# Altium PCB Mixer_module.PcbDoc
Units mil, origin at the board's own origin, x right, y up, seen from the top; angles counter-clockwise.
Board outline 6000 x 4000 mil, 2 copper layers (Top Layer, Bottom Layer); 13 components, 11 nets, 51 pads, 4 vias.
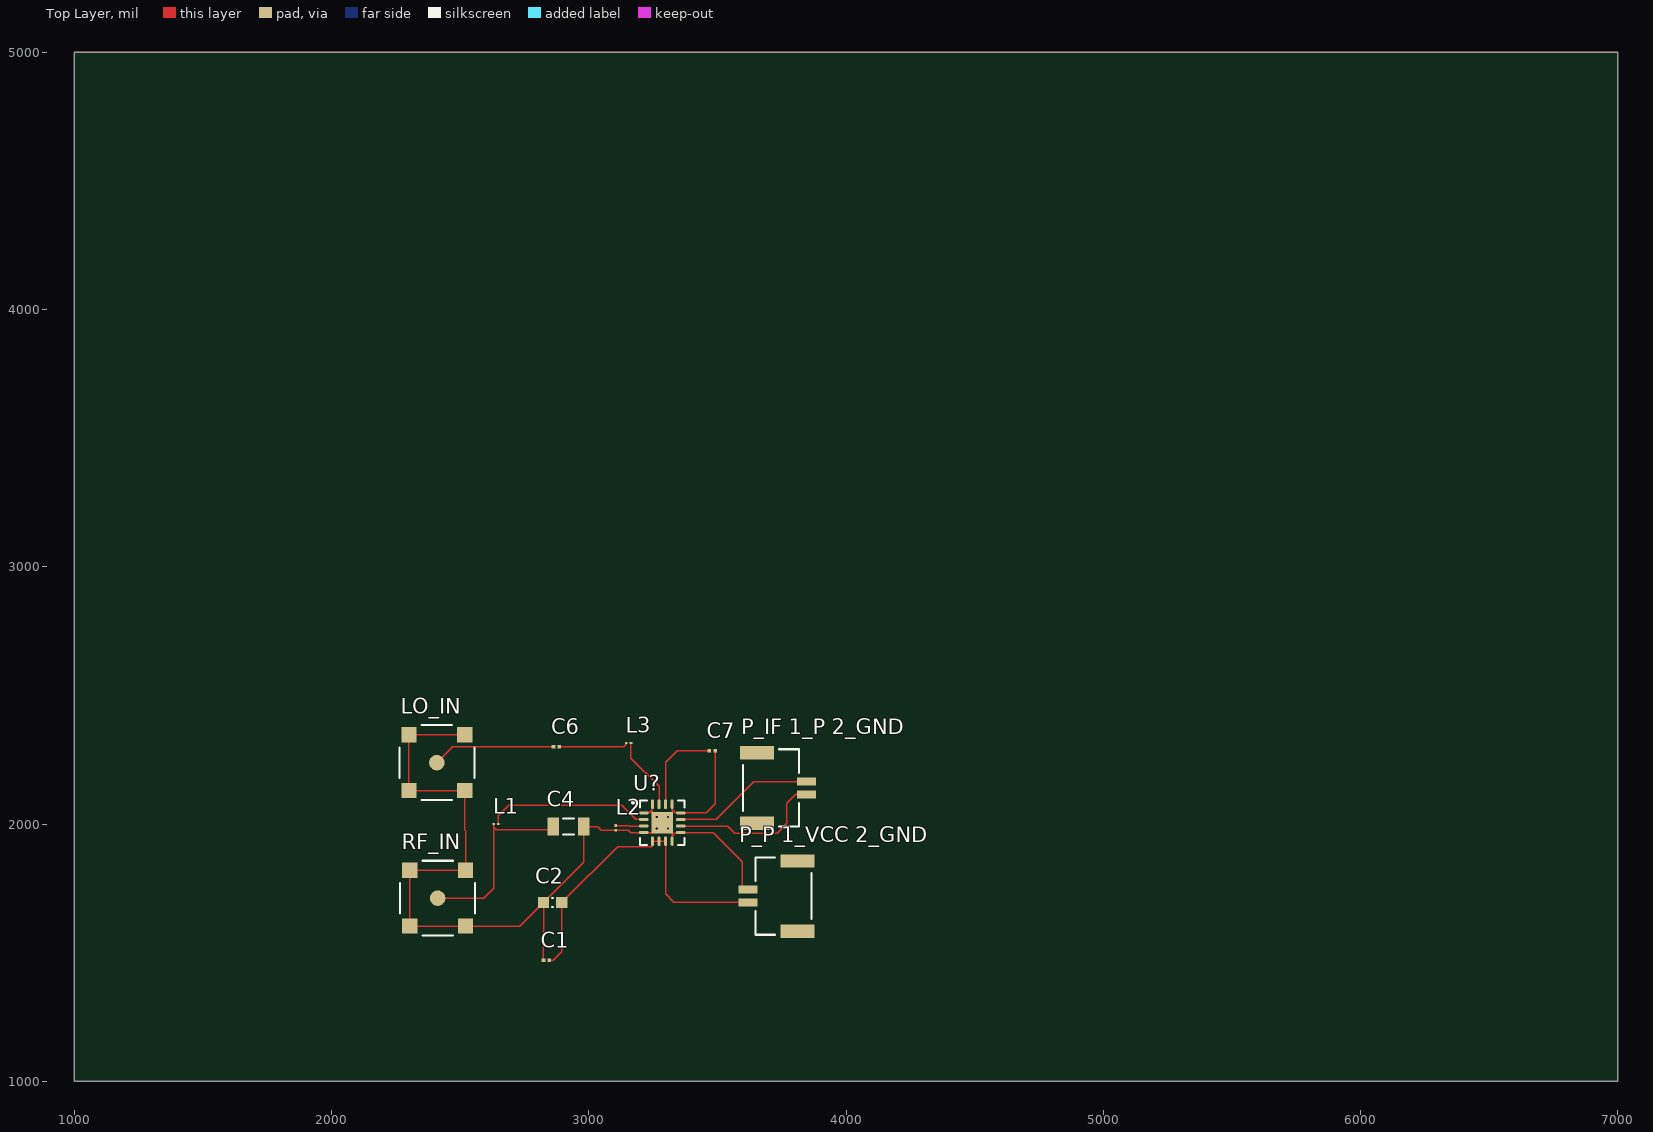
[diagram p0: Top Layer view]
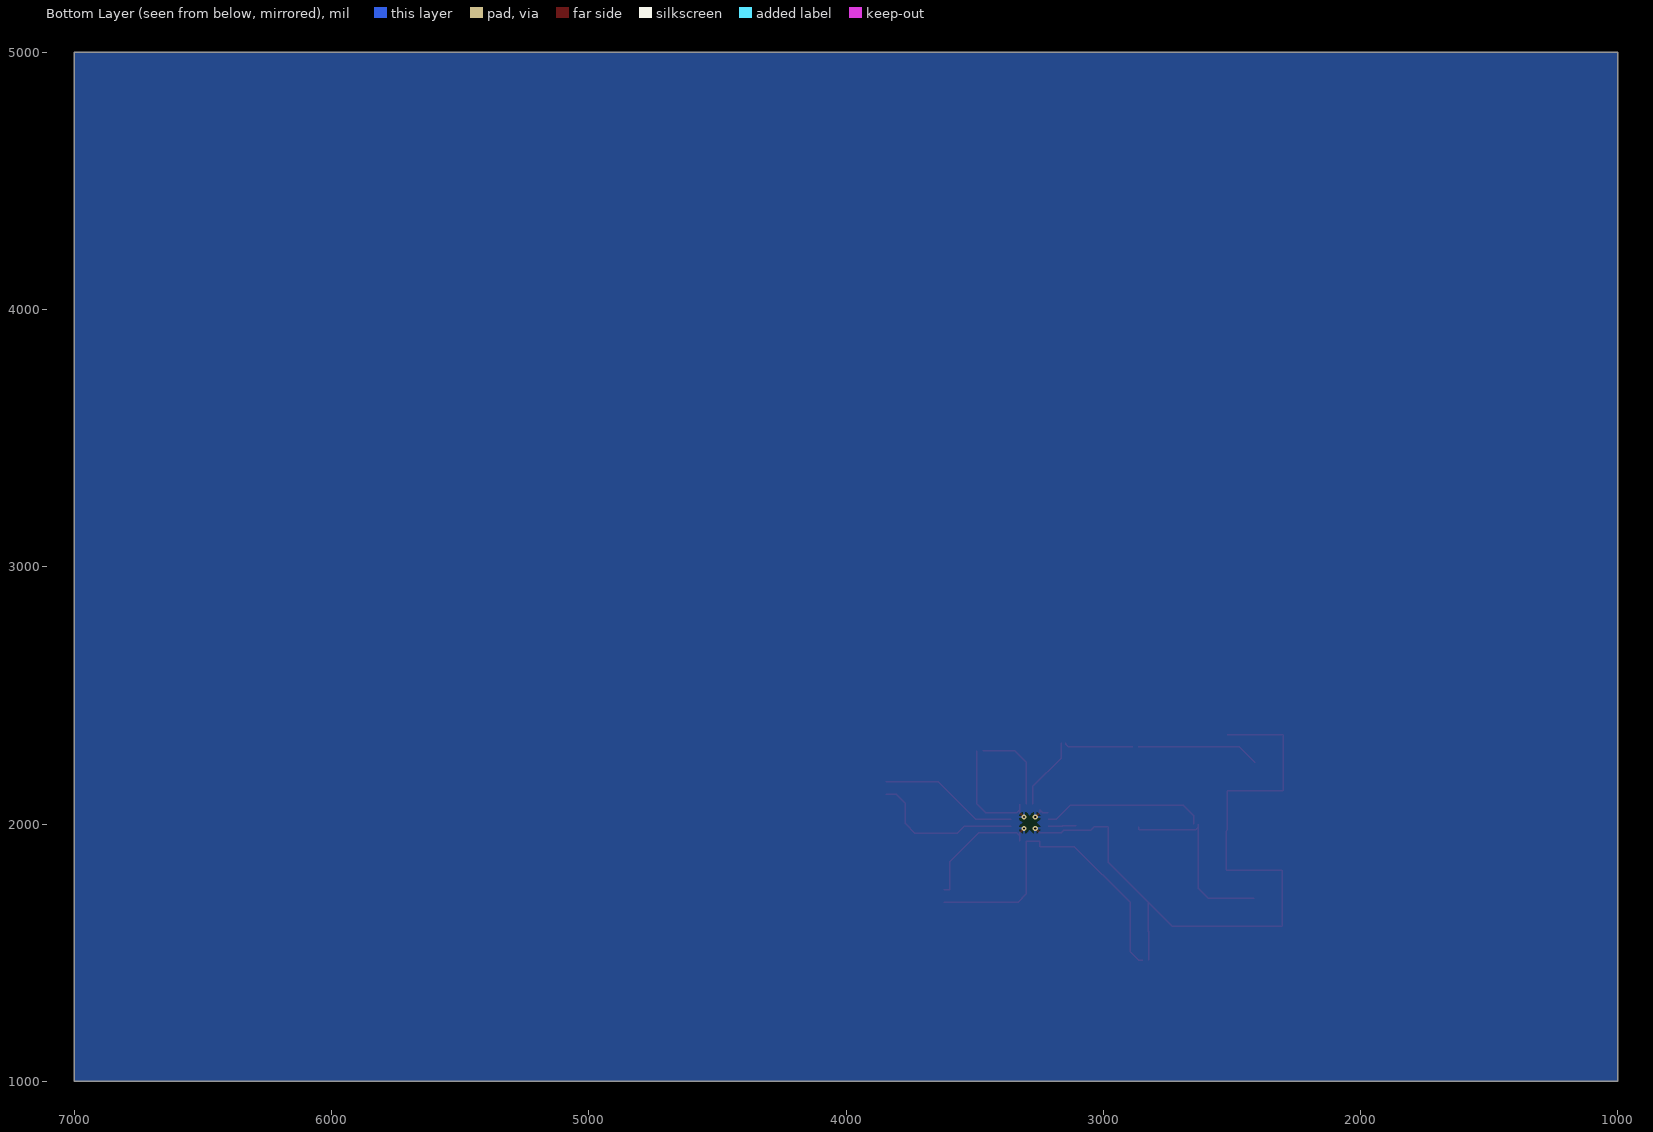
[diagram p1: Bottom Layer view, seen from below]

## Layer stack, top to bottom
Top Solder: solder mask 0.4, Solder Resist, Dk 3.5
Top Layer: signal copper 1.4
Dielectric 1: dielectric 12.6, FR-4, Dk 4.8
Bottom Layer: signal copper 1.4
Bottom Solder: solder mask 0.4, Solder Resist, Dk 3.5

## Board outline
1000,1000 7000,1000 7000,5000 1000,5000

## Design rules (kind name [scope] priority, off if disabled: settings)
Clearance [All] p1: gap=10
PolygonConnect [All] p1: connectstyle=Relief reliefconductorwidth=10 reliefentries=4 polygonreliefangle="90 Angle" airgapwidth=10
RoomDefinition Mixer_module [InComponentClass('Mixer_module')] p1: confinementstyle=ConfineIn formatcopy=TRUE lockcomponents=FALSE outline 2170,1355 4520,1355 4520,2535 2170,2535
RoutingVias [All] p1: holewidth=28 width=50 viastyle="Through Hole" minholewidth=28 minwidth=50 maxholewidth=28 maxwidth=50
SolderMaskExpansion [All] p1: expansion=4
Width [All] p1: maxlimit=10 minlimit=5 preferedwidth=10 toplayer_prefwidth=5 bottomlayer_minwidth=10 minimp=50.000000 maximp=50.000000 favimp=50.000000
30 further rules are at their usual default settings.

## Classes and differential pairs
component class Mixer_module: C1 C2 C4 C6 C7 L1 L2 L3 "P_IF 1_P 2_GND" "P_P 1_VCC 2_GND" RF_IN U?

## Components (designator, comment, footprint, x,y, rotation, side; value= is the part's Value field where it differs from the comment)
C1 "CAP 0.01uF 01005(0402)" CAPC01005(0402)22_N 2835,1470 r180 top
C2 "CAP 1uF 10V 0603(1608)" CAPC0603(1608)100_M 2859.57,1695 r0 top
C4 "CAP 2.7pF 10V 1206(3216)" CAPC1206(3216)100_N 2920.94,1990 r0 top
C6 "CAP 100pF 10V 01005(0402)" CAPC01005(0402)22_N 2873.98,2300 r0 top
C7 "CAP 100pF 10V 01005(0402)" CAPC01005(0402)22_N 3480,2285 r180 top
L1 "IND 1.3nH 400mA 200mOhms 01005" CAPC01005(0402)22_L 2639.06,2000 r0 top
L2 "IND 1.3nH 400mA 200mOhms 01005" CAPC01005(0402)22_L 3105,1985 r90 top
L3 "IND 10nH 01005" CAPC01005(0402)22_L 3155,2315 r0 top
LO_IN "CONREVSMA001-SMD" CON-REVSMA-SMD 2409.44,2238.5 r0 top
"P_IF 1_P 2_GND" "53780-0270" HEAD-SM1-25-2H2M 3750,2140 r270 top
"P_P 1_VCC 2_GND" "53780-0270" HEAD-SM1-25-2H2M 3715,1720 r90 top
RF_IN "CONREVSMA001-SMD" CON-REVSMA-SMD 2412.44,1711.5 r0 top
U? "LT5512EUF#PBF" LT-UF-16_L 3285.94,2005 r0 top

## Footprints (in the part's own frame and the unit in brackets; to place one, negate y for a bottom-side part, rotate by r counter-clockwise, add the part's x,y. Pads: shape width x height; smd on the part's side, far side on the other; paste and mask are expansions set on the pad)
CAPC0603(1608)100_M [mm] "Chip Capacitor, Body 1.6x0.8mm, Height 1.0mm, IPC Low Density"
  rect 1.1x1.1 smd: 1(-0.9,0) 2(0.9,0)
  silkscreen extent -0.05,-0.45 0.05,0.45, body extent -0.87,-0.47 0.88,0.48, height 1
CAPC01005(0402)22_L [mm]
  rect 0.26x0.22 smd: 1(-0.23,0) 2(0.23,0)
  body extent -0.21,-0.11 0.21,0.11, height 0.22
CAPC01005(0402)22_N [mm] "Chip Capacitor, Body 0.4x0.2mm, Height 0.22mm, IPC Medium Density"
  rect 0.36x0.32 smd: 1(-0.28,0) 2(0.28,0)
  body extent -0.21,-0.11 0.21,0.11, height 0.22
CAPC1206(3216)100_N [mm] "Chip Capacitor, Body 3.2x1.6mm, Height 1mm, IPC Medium Density"
  rect 1.15x1.8 smd: 1(-1.5,0) 2(1.5,0)
  silkscreen extent -0.55,-0.8 0.55,0.8, body extent -1.7,-0.9 1.7,0.9, height 1
CON-REVSMA-SMD [mil] "Connector, RP-SMA Female, 5-Lead, SM, Straight, Body 7x7mm"
  round 60 smd: 1(0,0)
  rect 59x59 smd: 2(-108.5,108.5) 3(108.5,108.5) 4(108.5,-108.5) 5(-108.5,-108.5)
  silkscreen extent -146,-146 146,146
HEAD-SM1-25-2H2M [mm] "Header, Wire-to-Board, SMT, Horizontal, 1-Row, Pitch 1.25mm, 2-Position"
  rect 0.8x1.9 smd: 1(-0.625,2.438) 2(0.625,2.438)
  rect 1.3x3.35 smd: MP1(-3.475,-2.437) MP2(3.475,-2.437)
  silkscreen extent -3.82,-3.81 3.82,1.69, body extent -3.82,-3.8 3.83,2.7, height 1.92
LT-UF-16_L [mm] "QFN, 16-Leads, Body 4.1x4.1mm, Pitch 0.65mm, Thermal Pad 2.15x2.15mm, IPC High Density"
  oval 0.95x0.3 smd: 1(-1.825,0.975) 2(-1.825,0.325) 3(-1.825,-0.325) 4(-1.825,-0.975) 9(1.825,-0.975) 10(1.825,-0.325) 11(1.825,0.325) 12(1.825,0.975)
  oval 0.3x0.95 smd: 5(-0.975,-1.825) 6(-0.325,-1.825) 7(0.325,-1.825) 8(0.975,-1.825) 13(0.975,1.825) 14(0.325,1.825) 15(-0.325,1.825) 16(-0.975,1.825)
  rect 2.15x2.15 smd: 17(0,0)
  silkscreen extent -2.97,-2.2 2.2,2.2, body extent -2.05,-2.05 2.05,2.05, height 0.8

## Part data
C1 C6 C7: library part CMP-1032-00399-1, "CAP 100pF 10V ±5% 01005 (0402 Metric) Thickness 0.22mm SMD"
C2: library part CMP-1035-02733-1, "CAP 1uF 10V ±10% 0603 (1608 Metric) Thickness 1mm SMD"
C4: library part CMP-1037-00207-1, "CAP 2.7pF 10V ±0.1pF 1206 (3216 Metric) Thickness 1mm SMD"
L1 L2 L3: library part CMP-1590-00012-1, "01005 (0402 Metric) Chip Capacitor"
LO_IN RF_IN: library part CMP-0168-00009-1, "RP-SMA Female Surface Mount Connector"
"P_IF 1_P 2_GND" "P_P 1_VCC 2_GND": library part CMP-0001-00087-1, "Header, Wire-to-Board, SMT, Horizontal, 1-Row, Pitch 1.25mm, 2-Position"
U?: library part CMP-1649-00001-1, "High Signal Level Active Mixer, 4.5 to 5.25 V, -40 to 85 degC, 16-Pin QFN (UF), RoHS, Tube"

## Via types
v1: diameter 19.68, hole 7.87, Top Layer to Bottom Layer, 4 vias

## Nets (pads, with @x,y where several pads share a name; then routed paths per layer and width w, separated by ;. In a path a pad name is that pad's centre, name@x,y a point inside that pad or via, vN(x,y) a via of type N, cw(c..) or ccw(c..) an arc to the next point about the centre after c; other vN are vias at no path point)
GND: "P_P 1_VCC 2_GND.2" C1.2 C2.1 C4.2 C7.1 L2.1 LO_IN.2 LO_IN.3 LO_IN.4 LO_IN.5 RF_IN.2 RF_IN.3 RF_IN.4 RF_IN.5 U?.1 U?.4 U?.8 U?.9 U?.12 U?.13 U?.16 U?.17 | length 3877.3
  Top Layer w5: LO_IN.3 LO_IN.2 LO_IN.5 LO_IN.4 2517.94,1976 2520.94,1973 RF_IN.3 RF_IN.2 2303.94,1777.06 2304,1777 2304,1603.06 RF_IN.5 RF_IN.4 2732.13,1603 C2.1 ; C1.2 2823.98,1582 2824.13,1582.16 C2.1 ; U?.1 3234.95,2043.39 3247.56,2056 3247.56,2043.39 v1(3264.29,2026.65) ; v1(3264.29,1983.35) 3247.56,1966.61 U?.4 3163.33,1966.61 3154,1975.95 L2.1 3049.05,1975.95 3035,1990 C4.2 2980,1850.87 C2.1 ; v1(3307.6,1983.35) 3324.33,1966.61 3324.33,1954.94 ; v1(3307.6,2026.65) 3324.33,2043.39 3324.33,2055.06 ; U?.8 3324.33,1954.94 ; U?.13 3324.33,2055.06 ; C7.1 3491.02,2078.41 3456,2043.39 U?.12 3336,2043.39 3324.33,2055.06 ; 3619.04,1744.61 3597,1744.61 3597,1853.61 3484,1966.61 U?.9 3336,1966.61 3324.33,1954.94
NetC4_1: C4.1 L1.1 RF_IN.1 | length 732.8
  Top Layer w5: RF_IN.1 2592,1711.5 2630,1749.5 2630,1987 ; L1.1 2630,1987 ; C4.1 2861.89,1977 2640,1977 2630,1987
NetC6_1: C6.1 LO_IN.1 | length 479
  Top Layer w5: LO_IN.1 2470.94,2300 C6.1
NetC6_2: C6.2 L3.1 | length 270.1
  Top Layer w5: C6.2 3136,2300 3145.94,2309.94 L3.1
NetC7_2: C7.2 U?.14 | length 352
  Top Layer w5: U?.14 3298.74,2240 3343.74,2285 C7.2
NetL1_2: L1.2 U?.2 | length 637.1
  Top Layer w5: L1.2 2648.11,2032.11 2688,2072 3127.8,2072 3182,2017.8 U?.2
NetL2_2: L2.2 U?.3 | length 109.9
  Top Layer w5: L2.2 3158,1994.06 3159.85,1992.2 U?.3
NetL3_2: L3.2 U?.15 | length 283.3
  Top Layer w5: L3.2 3164.06,2256 3273.15,2146.91 U?.15
"NetP_IF 1_P 2_GND_1": "P_IF 1_P 2_GND.1" U?.11 | length 549
  Top Layer w5: U?.11 3494.8,2017.8 3641.61,2164.61 3845.97,2164.61
"NetP_IF 1_P 2_GND_2": "P_IF 1_P 2_GND.2" U?.10 | length 606.8
  Top Layer w5: U?.10 3539.8,1992.2 3567,1965 3732,1965 3770,2003 3770,2080 3805.39,2115.39 3845.97,2115.39
VCC: "P_P 1_VCC 2_GND.1" C1.1 C2.2 U?.5 U?.6 U?.7 | length 1307.8
  Top Layer w5: C1.1 2861,1470 2895,1504 C2.2 3112,1912 3247.56,1912 U?.5 U?.6 U?.7 3298.74,1728 3331.35,1695.39 3619.04,1695.39
pads on no net: "P_IF 1_P 2_GND.MP1" "P_IF 1_P 2_GND.MP2" "P_P 1_VCC 2_GND.MP1" "P_P 1_VCC 2_GND.MP2"

## Polygon pours and split planes (outlines as drawn)
GND on Top Layer "GND" (solid, pour order 0): 1000,1000 7000,1000 7000,5000 1000,5000